# Altium PCB Tigershark 3D R2.2.PcbDoc (part 2 of 4)
Units mil, origin at the board's own origin, x right, y up, seen from the top; angles counter-clockwise.
Board outline 4100 x 4050 mil, 4 copper layers (Top Layer, Groun Plane, Power Plane, Bottom Layer), stack 61.73 mil thick; 359 components, 238 nets, 1141 pads, 830 vias.
Unrouted connection lines stored in the file: 3.
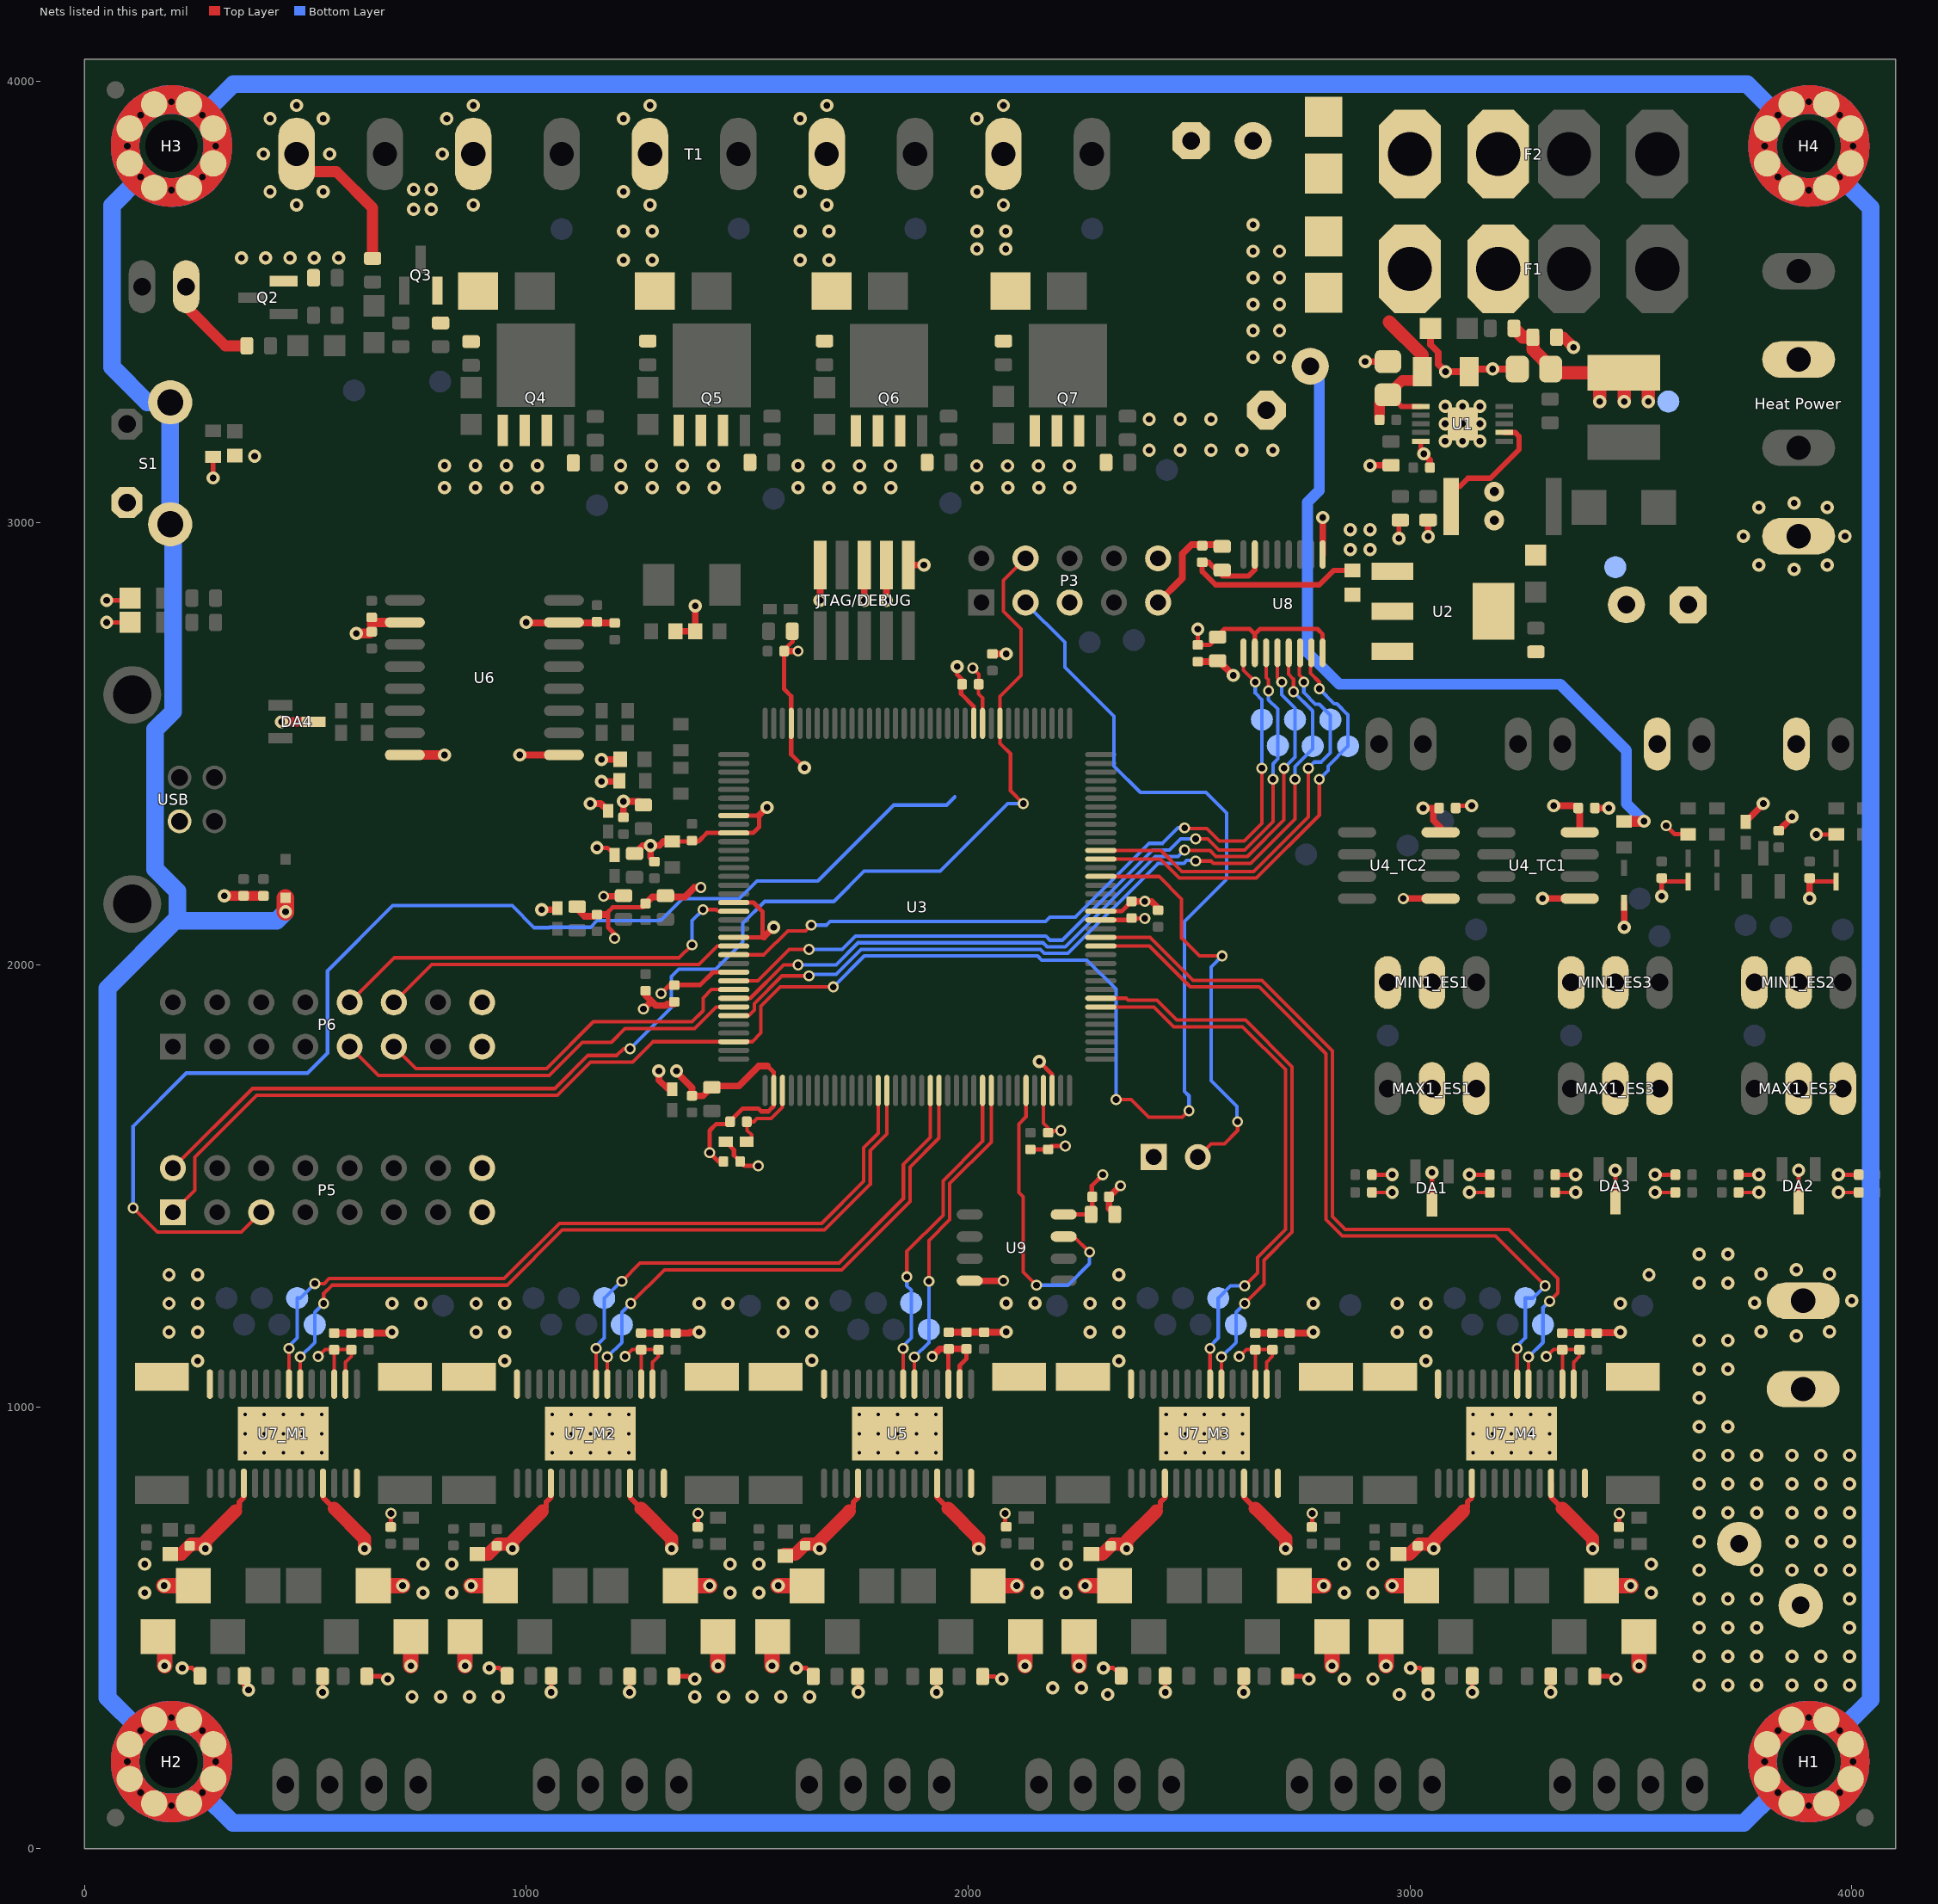
[diagram p4: the nets of this part, all layers, seen from the top]

## Footprints (in the part's own frame and the unit in brackets; to place one, negate y for a bottom-side part, rotate by r counter-clockwise, add the part's x,y. Pads: shape width x height; smd on the part's side, far side on the other; paste and mask are expansions set on the pad) (continued)
MAXM-S8+4_N [mm] "SOIC, 8-Leads, Body 4.9x3.9mm, Pitch 1.27mm, IPC Medium Density"
  oval 2.2x0.6 smd: 1(-2.4,1.905) 2(-2.4,0.635) 3(-2.4,-0.635) 4(-2.4,-1.905) 5(2.4,-1.905) 6(2.4,-0.635) 7(2.4,0.635) 8(2.4,1.905)
  silkscreen extent -2.53,-2.5 0.9,2.88, body extent -2,-2.5 2,2.5, height 1.75
"MSTBV2 - duplicate" [mil]
  oval 82.5x165 hole 55: 1(-300,0) 2(-100,0)
  silkscreen extent -425,-150 25,180, body extent -425,-150 25,180, height 472
MSTBV4 [mil]
  oval 82.5x165 hole 55: 1(-300,0) 2(-100,0) 3(100,0) 4(300,0)
  silkscreen extent -425,-150 425,180, body extent -428,-153 428,183, height 472
MSTBV10 [mil]
  oval 82.5x165 hole 55: 1(-900,0) 2(-700,0) 3(-500,0) 4(-300,0) 5(-100,0) 6(100,0) 7(300,0) 8(500,0) 9(700,0) 10(900,0)
  silkscreen extent -1025,-150 1025,180, body extent -1028,-153 1025,183, height 472
OSHW_8X150_NOTEXT [mil]
  silkscreen extent 0,0 167,150, body extent 0,2 168,148
PN61729 [mil]
  round 54 hole 38: 1(50,186) 2(-49.21,186) 3(-49.21,107) 4(50,107)
  round 130.5 hole 87: 5(-236.22,0) 6(237,0)
  body extent -237,-405 238,226, height 406
PSMN7R0-60YS [mm] "TO, 5-Pads, Body 5.15x5.86mm (max), IPC Medium Density"
  rect 1.8x0.6 smd: 1(-2.6,1.905) 2(-2.6,0.635) 3(-2.6,-0.635) 4(-2.6,-1.905)
  rect 4.8x4.5 smd: 5(1.14,0)
  silkscreen extent -2.72,2.63 -2.48,2.88, body extent -1.85,-2.5 2.25,2.5, height 1.2
R0402 [mil]
  rrect40% 22x24 smd: 1(-18.9,0) 2(19,0)
  body extent -20,-10 20,10, height 14
R0603 [mm]
  rrect40% 0.74x1 smd: 1(-0.68,0) 2(0.68,0)
  body extent -0.8,-0.4 0.8,0.4, height 0.8
Resistor2512 [mm]
  rect 1.6x3.1 smd: 1(-3.25,0) 2(3.25,0)
  silkscreen extent -2.26,-1.3 2.26,1.3, body extent -3.24,-1.4 3.24,1.4, height 0.9
S25FL216K0PMFI041 [mm] "SOIC, 8-Leads, Body 4.90x3.90mm, Pitch 1.27mm, IPC Medium Density"
  oval 1.5x0.6 smd: 1(-2.7,1.905) 2(-2.7,0.635) 3(-2.7,-0.635) 4(-2.7,-1.905) 5(2.7,-1.905) 6(2.7,-0.635) 7(2.7,0.635) 8(2.7,1.905)
  silkscreen extent -2.82,-2.45 1.55,2.88, body extent -1.95,-2.45 1.95,2.45, height 1.75
SK310A-TP [mm] "Molded Diode, 2-Leads, Body 4.31x2.69mm, IPC Medium Density"
  rect 2.3x2.15 smd: 1(-1.625,0) 2(1.625,0)
  silkscreen extent -2.3,-1.45 3.07,1.75, body extent -2.29,-1.42 2.28,1.42, height 2.95
SMA-SM [mil]
  rect 79x79 smd: A(79,0) C(-78.74,0)
  silkscreen extent -89,-49 89,50, body extent -105,-54 105,55, height 116
SOD323-R [mil]
  rect 24x24 smd: A(44,0) C(-43.31,0)
  body extent -50,-31 50,31, height 28
SOT95P230X110-3N [mm] "SOT23, 3-Leads, Body 2.90x2.30mm, Pitch 0.95mm, IPC Medium Density"
  rect 1.4x0.6 smd: 1(-0.95,0.95) 2(-0.95,-0.95) 3(0.95,0)
  silkscreen extent -1.07,-1.5 0.7,1.93, body extent -0.7,-1.5 0.7,1.5, height 1.1
SOT230P700X190-4N [mm] "SOT223, 4-Leads, Body 6.50x7.00mm (avg), Pitch 2.30mm, IPC Medium Density"
  rect 2.4x1 smd: 1(-2.9,2.3) 2(-2.9,0) 3(-2.9,-2.3)
  rect 2.4x3.25 smd: 4(2.9,0)
  silkscreen extent -3.02,-3.35 1.4,3.47, body extent -1.85,-3.35 1.85,3.35, height 1.9
SZMM3Z4V7T1G [mm] "Molded Diode, 2-Leads, Body 1.70x1.25mm, IPC Medium Density"
  rect 0.9x0.35 smd: 1(-1,0) 2(1,0)
  silkscreen extent -0.95,-0.7 1.4,0.7, body extent -0.9,-0.67 0.9,0.67, height 1
TP-2#1 [mil]
  round 50 smd far side: 1(0,0)
TP-2#2 [mil]
  round 50 smd: 1(0,0)
TSOP65P640X120-16N [mm] "TSOP, 16-Leads, Body 5.00x4.40mm, Pitch 0.65mm, IPC Medium Density"
  oval 1.65x0.35 smd: 1(-2.825,2.275) 2(-2.825,1.625) 3(-2.825,0.975) 4(-2.825,0.325) 5(-2.825,-0.325) 6(-2.825,-0.975) 7(-2.825,-1.625) 8(-2.825,-2.275) 9(2.825,-2.275) 10(2.825,-1.625) 11(2.825,-0.975) 12(2.825,-0.325) 13(2.825,0.325) 14(2.825,0.975) 15(2.825,1.625) 16(2.825,2.275)
  silkscreen extent -2.95,-2.55 1.6,3.12, body extent -2.25,-2.55 2.25,2.55, height 1.2
VSSOP10 [mm] "TSSOP, 10-Leads, Body 3.15x3.00mm, Pitch 0.50mm, Thermal Pad 2.05.2x1.50.2mm, IPC High Density"
  rect 1.02x0.3 smd mask+0.102: 1(-2.4,1) 2(-2.4,0.5) 3(-2.4,0) 4(-2.4,-0.5) 5(-2.4,-1) 6(2.4,-1) 7(2.4,-0.5) 8(2.4,0) 9(2.4,0.5) 10(2.4,1)
  rect 1.73x1.9 smd: 11(0,0)
  silkscreen extent -2.02,-1.7 0.65,1.82, body extent -1.55,-1.7 1.55,1.7, height 1.09
Wave_hole_3x7-singleSided#1 [mil]
  round 0 hole 118.11 unplated paste+0 mask-112: 0(0,1.85)
  round 0 hole 15 paste-20 mask-20: 1(-100,0) 1(-70,-70) 1(-70,70) 1(0,-100) 1(0,100) 1(70,-70) 1(70,70) 1(100,0)
  round 60 smd paste-5 mask+0: 1(-94.49,-39.37) 1(-94.49,39.37) 1(-39.37,-94.49) 1(-39.37,94.49) 1(39.37,-94.49) 1(39.37,94.49) 1(94.49,-39.37) 1(94.49,39.37)
  Top Layer circle w64.96: c0,0 r105
  Bottom Layer lines w64.96: -78.26,-70 cw(c0,0) 74.25,74.25 cw(c0,0) 105,0 cw(c0,0) -78.26,-70
  body extent -105,-105 105,105
Wave_hole_3x7-singleSided#2 [mil]
  round 0 hole 118.11 unplated paste+0 mask-112: 0(0,0)
  round 0 hole 15 paste-20 mask-20: 1(-100,0) 1(-70,-70) 1(-70,70) 1(0,-100) 1(0,100) 1(70,-70) 1(70,70) 1(100,0)
  round 60 smd paste-5 mask+0: 1(-94.49,-39.37) 1(-94.49,39.37) 1(-39.37,-94.49) 1(-39.37,94.49) 1(39.37,-94.49) 1(39.37,94.49) 1(94.49,-39.37) 1(94.49,39.37)
  Top Layer circle w64.96: c0,0 r105
  Bottom Layer lines w64.96: -74.25,74.25 cw(c0,0) 105,0 cw(c0,0) 74.25,-74.25 cw(c0,0) -74.25,74.25
  body extent -105,-105 105,105
XAL50xx-153 [mm] "Precision Wire Wound Inductor, 2-Leads, Body 5.28x5.48mm, IPC High Density"
  rect 2.05x4.2 smd: 1(-2,0) 2(2,0)
  silkscreen extent -2.75,-2.85 2.75,2.85, body extent -2.74,-2.84 2.74,2.84, height 4.25

## Part data
C1_ES1 C1_ES2 C1_ES3 C2_ES1 C2_ES2 C2_ES3 C24 C50 C71_M1 C71_M2 C71_M3 C71_M4: library part GRM155R60J474KE19D, "0.47uF 6.3v C0402 - GRM155R60J474KE19D"
C3_M1 C3_M2 C3_M3 C3_M4 C5_M1 C5_M2 C5_M3 C5_M4 C6_M1 C6_M2 C6_M3 C6_M4 C8_M1 C8_M2 C8_M3 C8_M4 C52 C62 C67 C72: library part CC0603ZRY5V6BB105, "CAP CER 0603 1uF 10V Y5V"
C4 C35 C43 C44 C66_M1 C66_M2 C66_M3 C66_M4 C73: library part "Cap Semi", "Capacitor (Semiconductor SIM Model)"
C7: library part UPW1H471MHD1TO, "CAP ALU 470uF 50V 20%"
C9: library part C1206C475K5PACTU, "CAP CER 1206 4.7uF 50V 10% X5R"
C10: library part GRM21BR71H105KA12L, "CAP CER 0805 1uF 50V 10% X7R"
C11 C40: library part C0603C104K5RACTU, "CAP CER 0603 100nF 50V 10% X7R"
C12_M1 C12_M2 C12_M3 C12_M4 C14_M1 C14_M2 C14_M3 C14_M4 C19 C23 C27 C31_TC1 C31_TC2 C33 C37 C38 C39 C41 C42 C45 C46 C47 C48 C51 C53 C54 C56 C57 C58 C59 C61 C69 C70 C75_M1 C75_M2 C75_M3 C75_M4: library part "100nF C0402 - GRM155R71C104KA88D", "Capacitor (Semiconductor SIM Model)"
C13 C17 C25 C28 C29 C32 C36 C55 C60: library part C1608JB0J106K080AB, "CAP CER 10UF 6.3V 10% JB 0603"
C15 C16 C18: library part UVZ1H101MPD1TD, "CAP ALU 100uF 50V 20% 105C"
C20 C26 C30_TR1 C30_TR2 C34 C64 C65: library part GRM155R71C104KA88D, "CAP CER 0.1UF (100nF) 16V 10% X7R 0402"
C21: library part C0805C106K8PACTU, "CAP CER 0805 10uF 10V 10% X5R"
C22: library part GRM155R60J105KE19D, "CAP CER 0402 1uF 6.3V 10% X5R"
C49 C68_M1 C68_M2 C68_M3 C68_M4: library part GRM155R71H103JA88D, "CAP CER 10000PF 50V X7R 0402"
C63: "Capacitor (Semiconductor SIM Model)"
D1: library part "D Zener", "Zener Diode"
D2: library part SK310A, "DIODE Schottky 3A SMA"
D3_TR1 D3_TR2 D5_TR1 D5_TR2: "High Conductance Fast Diode"
D4 D6 D12 D15 D17 D19: library part "D Schottky", "Schottky Diode"
D7 D9: "LED 0805 Red"
D8: "DIODE TVS"
D10 D11 D13 D14 D16 D18 D24 D29: "LED 0805 Yellow"
D20_M1 D20_M2 D20_M3 D20_M4 D21_M1 D21_M2 D21_M3 D21_M4 D22_M1 D22_M2 D22_M3 D22_M4 D23_M1 D23_M2 D23_M3 D23_M4 D25 D26 D27 D28: "DIODE TVS 30V SMA"
DA1 DA2 DA3 DA4 DA5: "PESDxL2BT TVS Diode Array 2x"
F1 F2: library part "Fuse 1", "Fuse"
"Heat Power": library part con-phoenix-508_4
JTAG/DEBUG: library part "ARM Cortex JTAG-DEBUG Header"
L1: "IND 15uH 3.9A 20%"
M1_M1 M1_M2 M1_M3 M1_M4 M2 M3: library part "Molex 0705430003 Alt", "Molex 4 Pin Clip Connector"
MAX1_ES1 MAX1_ES2 MAX1_ES3 MIN1_ES1 MIN1_ES2 MIN1_ES3: library part "Molex Endstop"
"Motor Power": library part con-phoenix-508_2
P1: library part "Header 2", "Header, 2-Pin"
P3: "Header, 5-Pin, Dual row"
P5 P6: "16 Pos 2.54mm Pin Connector Shrouded"
Q2 Q3 Q4 Q5 Q6 Q7: "N-Channel MOSFET"
R1 R14_TR1 R14_TR2 R19_TR1 R19_TR2 R21: "Resistor"
R2_ES1 R2_ES2 R2_ES3 R3_ES1 R3_ES2 R3_ES3: library part ERJ-2GEJ272X, "RES SMD 2.7K OHM 5% 1/10W 0402"
R4 R5 R15 R16 R18 R20 R22 R23 R31_M1 R31_M2 R31_M3 R31_M4 R32_M1 R32_M2 R32_M3 R32_M4 R33_M1 R33_M2 R33_M3 R33_M4 R37 R38 R39: library part Res3, "Resistor"
R6 R46 R55 R59 R63 R67 R71: library part RC0603FR-07100KL, "RES 100K OHM 1/10W 1% 0603 SMD"
R7 R10 R12: library part ERJ-3EKF1002V, "RES 0603 10K 100mW 1%"
R8 R11 R25 R26: library part ERJ-3EKF1001V, "RES 0603 1K 100mW 1%"
R9: library part RL2512FK-070R06L, "RES 0.06 OHM 1W 1% 2512 SMD"
R13 R47 R56 R60 R64 R68: library part RC0603JR-071K8L, "RES 0603 1.8K 100mW 5%"
R17: library part CRCW0402200KFKED, "RES 0402 22r 63mW 1%"
R24 R30_M1 R30_M2 R30_M3 R30_M4 R36: library part ERJ2GEJ105X, "RES 0402 1M 100mW 5%"
R45 R52 R58 R62 R66 R70: library part CRCW060310R0FKEA, "RES 0603 10r 100mW 1%"
S1: library part 1571610-2_1, "SWTCH Momentary Washable"
T1: library part "0395311010 - Molex 10 Position Connector", "MSBTV10 10 port connector same as RAMBo"
TP1 TP2 TP3 TP4 TP5 TP6 TP7 TP8 TP9_ES1 TP9_ES2 TP9_ES3 TP10_ES1 TP10_ES2 TP10_ES3 TP11 TP12 TP13 TP14 TP15 TP16 TP17 TP18 TP19 TP20 TP21 TP32_M1 TP32_M2 TP32_M3 TP32_M4 TP33_M1 TP33_M2 TP33_M3 TP33_M4 TP35_M1 TP35_M2 TP35_M3 TP35_M4 TP36_M1 TP36_M2 TP36_M3 TP36_M4 TP37_M1 TP37_M2 TP37_M3 TP37_M4 TP38 TP39_M1 TP39_M2 TP39_M3 TP39_M4 TP40_M1 TP40_M2 TP40_M3 TP40_M4 TP41 TP42 TP43 TP44 TP45 TP46 TP47 TP48 TP49 TP50 TP51 TP52_TR1 TP52_TR2: library part Socket, "Socket"
U1: library part LM25011, "REG BUCK"
U4_TC1 U4_TC2: "Cold Junction Compensated Thermocouple to Digital Converter, 14 Bits Temperature Resolution, -40 to 125 degC, 8-Pin SOIC (S8+4), Pb-Free"
U5 U7_M1 U7_M2 U7_M3 U7_M4: "DRV8825 Ti Stepper Driver"
U6: "USB Opto Isolator"
U8: library part TXB0106, "TXB0106 - Bidriectional Opendrain/pushpull level shift"
X2: library part XTAL, "Crystal Oscillator"

## Via types
v1: diameter 30, hole 15, Top Layer to Bottom Layer, tented both sides, 528 vias
v2: diameter 25, hole 15, Top Layer to Bottom Layer, tented both sides, 154 vias
v3: diameter 19.68, hole 7.87, Top Layer to Bottom Layer, 75 vias
v4: diameter 25, hole 15, Top Layer to Bottom Layer, 61 vias
v5: diameter 30, hole 15, Top Layer to Bottom Layer, 9 vias
v6: diameter 45, hole 20, Top Layer to Bottom Layer, tented both sides, 2 vias
v7: diameter 25, hole 15, Top Layer to Bottom Layer, tented bottom, 1 vias

## Nets (pads, with @x,y where several pads share a name; then routed paths per layer and width w, separated by ;. In a path a pad name is that pad's centre, name@x,y a point inside that pad or via, vN(x,y) a via of type N, cw(c..) or ccw(c..) an arc to the next point about the centre after c; other vN are vias at no path point)
3.3VCC: C12_M1.2 C12_M2.2 C12_M3.2 C12_M4.2 C14_M1.2 C14_M2.2 C14_M3.2 C14_M4.2 C18.1 C25.2 C26.2 C29.2 C31_TC1.2 C31_TC2.2 C34.2 C45.2 C46.2 C47.2 C48.2 C64.2 C69.2 C70.2 FB1.2 FB5.1 FB6.1 FB7.1 FB8.1 FB9.1 JTAG/DEBUG.1 MAX1_ES1.3 MAX1_ES2.3 MAX1_ES3.3 MIN1_ES1.3 MIN1_ES2.3 MIN1_ES3.3 P1.1 P3.10 P5.16 P6.16 R2_ES1.2 R2_ES2.2 R2_ES3.2 R3_ES1.2 R3_ES2.2 R3_ES3.2 R6.2 R11.2 R19_TR1.2 R19_TR2.2 R21.2 TP3.1 U2.3 U3.11 U3.62 U3.105 U3.125 U4_TC1.4 U4_TC2.4 U5.16 U5.17 U7_M1.16 U7_M1.17 U7_M2.16 U7_M2.17 U7_M3.16 U7_M3.17 U7_M4.16 U7_M4.17 U8.2 U8.8 U9.8 | length 3420.9
  Top Layer w8: v2(528.74,1113.74) 544.74,1129.74 C12_M1.2@563.74,1129.74 ; U7_M1.17@565.16,1052.2 565.16,1128.32 C12_M1.2@563.74,1129.74 ; U7_M1.16@588.74,1054.21 590.75,1052.2 590.75,1100.75 603.74,1113.74 C14_M1.2@603.74,1128.74 ; C14_M1.2@603.74,1129.74 C12_M1.2@563.74,1129.74 ; R6.2@1211.77,2155 R6.2@1215,2151.77 ; v2(1223.74,1113.74) 1239.74,1129.74 C12_M2.2@1258.74,1129.74 ; U7_M2.17@1260.16,1052.2 1260.16,1128.32 C12_M2.2@1258.74,1129.74 ; U7_M2.16@1283.74,1054.21 1285.75,1052.2 1285.75,1100.75 1298.74,1113.74 C14_M2.2@1298.74,1128.74 ; C14_M2.2@1298.74,1129.74 C12_M2.2@1258.74,1129.74 ; JTAG/DEBUG.1@1865,2904.92 JTAG/DEBUG.1@1865.08,2905 ; v2(2010.47,2671.46) 2024.47,2657.46 2024.47,2627.54 2023.56,2626.63 2023.56,2613.37 2032.64,2604.29 U3.11@2032.64,2546.46 ; U3.105@2170.43,1715.75 2170.43,1641.77 2181.1,1631.1 C45.2@2181.1,1620.1 2186.2,1615 2196.2,1625 v2(2210,1625) ; v4(2613.74,1113.74) 2629.74,1129.74 C12_M3.2@2648.74,1129.74 ; U7_M3.17@2650.16,1052.2 2650.16,1128.32 C12_M3.2@2648.74,1129.74 ; U7_M3.16@2673.74,1054.21 2675.75,1052.2 2675.75,1100.75 2688.74,1113.74 C14_M3.2@2688.74,1128.74 ; C14_M3.2@2688.74,1129.74 C12_M3.2@2648.74,1129.74 ; R3_ES1.2@2914,1485 v1(2960,1485) ; v1(3135,1485) R2_ES1.2@3181,1485 ; v4(3308.74,1113.74) 3324.74,1129.74 C12_M4.2@3343.74,1129.74 ; R3_ES3.2@3329,1485 v1(3375,1485) ; U7_M4.17@3345.16,1052.2 3345.16,1128.32 C12_M4.2@3343.74,1129.74 ; U7_M4.16@3368.74,1054.21 3370.75,1052.2 3370.75,1100.75 3383.74,1113.74 C14_M4.2@3383.74,1128.74 ; C14_M4.2@3383.74,1129.74 C12_M4.2@3343.74,1129.74 ; v1(3555,1485) R2_ES3.2@3601,1485 ; R3_ES2.2@3744,1485 v1(3790,1485) ; v1(3970,1485) R2_ES2.2@4016,1485
  Top Layer w10: v1(291,3102) R21.2@291,3149.47 ; v1(1160,2265) 1183.62,2265 FB7.1@1200,2248.62 ; v2(1305,1935) 1324.5,1954.5 1393.54,1954.5 1422.51,1983.46 U3.62@1469.65,1983.46 ; FB9.1@1451.38,1600 1470,1581.38 1470,1569 C64.2@1484,1555 1494,1545 v4(1525,1545) ; U5.17@1955.42,1051.94 C69.2@1955.42,1129.9 ; U5.16@1981.01,1051.94 1981.01,1093.49 1996.26,1108.74 C70.2@1996.26,1130.74 ; U9.8@2216.3,1435 C29.2@2278.23,1435 2281,1437.77 C34.2@2281,1475 2280,1476 2280,1500 v2(2305,1525) ; U3.125@2300.35,2101.57 C46.2@2365.57,2101.57 ; C46.2@2371,2105 v2(2400,2105) ; v1(2520,2760) C26.2@2520,2724 2547.23,2724 C25.2@2565,2741.77 ; C25.2@2560,2740 2580,2760 2637.44,2760 2649.02,2748.42 ; U8.2@2649.02,2706.22 2649.02,2748.42 ; U8.8@2802.57,2706.22 2802.57,2747.87 2790.44,2760 2660.61,2760 2649.02,2748.42 ; 3367.95,2360 C31_TC1.2@3384.49,2343.46 ; v2(3580,2315) 3599.53,2295.47 R19_TR2.2@3630,2295.47 ; v1(3920,2295) 3964.53,2295 R19_TR1.2@3965,2295.47
  Top Layer w15: v1(1035,2125) 1059.72,2125 FB5.1@1060,2124.72 ; v1(1145,2365) 1168.62,2365 FB8.1@1185,2348.62 ; v2(1175,2155) 1201.77,2155 1206.77,2150 R6.2@1211.77,2155 ; v1(1300,1760) 1300,1739.72 FB6.1@1320,1719.72 ; JTAG/DEBUG.1@1865.08,2905 v1(1900,2905) ; v4(1918.77,1113.71) 1935.8,1130.74 C69.2@1956.26,1130.74 C70.2@1996.26,1130.74 ; C46.2@2370,2106 C46.2@2371,2105 ; v1@3025,2360 3025,2355 3052.95,2355 ; C31_TC2.2@3056,2355 3052.95,2355 ; U4_TC2.4@3069.49,2300 3069.49,2311.02 3052.95,2327.56 3052.95,2355 ; v1(3325.51,2360) 3367.95,2360 ; U4_TC1.4@3384.49,2300 C31_TC1.2@3384.49,2343.46 ; FB1.2@3760,2323.62 3800,2363.62 v1(3800,2365)
  other v1: 3030,2355
+5VCC: C4.2 C11.1 C17.2 C20.2 C21.1 L1.2 R7.2 R8.2 R10.1 TP1.1 U2.1 U8.15 | length 1132.3
  Top Layer w12: C20.2@2530,2911 2530,2890 2560,2860 2795,2860 2827.56,2892.56 C4.2@2870,2892.56 ; C20.2@2530,2916 2531.51,2915.49 2544.88,2911 2575.88,2880 2635,2880 2649.02,2894.02 U8.15@2649.02,2928.66
  Top Layer w15: v1@2909.31,3130.43 2957.09,3130.43 R7.2@2957.32,3130.65 ; v1(3041.31,2969.43) R10.1@3041.31,3006.66
  Top Layer w30: R8.2@3235.54,3440.43 3255.54,3420.43 C11.1@3278.54,3420.43 3278.54,3392.69 3318.72,3352.52 C21.1@3318.72,3348.43 ; C21.1@3326.98,3340.17 L1.2@3484.31,3340.17 ; v1(3430,3275) L1.2@3430,3335.17 ; v1(3485,3275) L1.2@3485,3339.48 ; v1(3540,3275) L1.2@3540,3340
  other v1: 2865,2940 2910,2940 2865,2985 2910,2985 2910,3130
+12VCC1: "Motor Power.1" C7.1 C35.1 C66_M1.1 C66_M2.1 C66_M3.1 C66_M4.1 R30_M1.2 R30_M2.2 R30_M3.2 R30_M4.2 R36.2 U5.4 U5.11 U7_M1.4 U7_M1.11 U7_M2.4 U7_M2.11 U7_M3.4 U7_M3.11 U7_M4.4 U7_M4.11 | length 2331.6
  Top Layer w12: 341.26,763.74 350.26,772.74 350.26,784.25 360.43,794.42 U7_M1.4@360.43,826.8 U7_M1.4@360.43,827.8 ; U7_M1.11@539.57,827.8 539.57,795.43 565,770 ; 1036.26,763.74 1045.26,772.74 1045.26,784.25 1055.43,794.42 U7_M2.4@1055.43,826.8 U7_M2.4@1055.43,827.8 ; U7_M2.11@1234.57,827.8 1234.57,795.43 1260,770 ; 1731.29,763.71 1740.29,772.71 1740.29,784.22 1750.46,794.39 U5.4@1750.46,826.76 ; U5.11@1929.6,827.76 1929.6,795.4 1955.03,769.97 ; 2426.26,763.74 2435.26,772.74 2435.26,784.25 2445.43,794.42 U7_M3.4@2445.43,826.8 U7_M3.4@2445.43,827.8 ; U7_M3.11@2624.57,827.8 2624.57,795.43 2650,770 ; 3121.26,763.74 3130.26,772.74 3130.26,784.25 3140.43,794.42 U7_M4.4@3140.43,826.8 U7_M4.4@3140.43,827.8 ; U7_M4.11@3319.57,827.8 3319.57,795.43 3345,770
  Top Layer w30: C66_M1.1@193.74,666.18 218.7,666.18 241.26,688.74 263.74,688.74 v1(273.74,678.74) 273.74,696.22 341.26,763.74 ; 565,770 633.74,701.26 v1(633.74,678.74) ; C66_M2.1@888.74,666.18 913.7,666.18 936.26,688.74 958.74,688.74 v1(968.74,678.74) 968.74,696.22 1036.26,763.74 ; 1260,770 1328.74,701.26 v1(1328.74,678.74) ; C35.1@1583.77,666.15 1608.73,666.15 1631.29,688.71 1653.77,688.71 v1(1663.77,678.71) 1663.77,696.19 1731.29,763.71 ; 1955.03,769.97 2023.77,701.23 v1(2023.77,678.71) ; C66_M3.1@2278.74,666.18 2303.7,666.18 2326.26,688.74 2348.74,688.74 v1(2358.74,678.74) 2358.74,696.22 2426.26,763.74 ; 2650,770 2718.74,701.26 v1(2718.74,678.74) ; C66_M4.1@2973.74,666.18 2998.7,666.18 3021.26,688.74 3043.74,688.74 v1(3053.74,678.74) 3053.74,696.22 3121.26,763.74 ; 3345,770 3413.74,701.26 v1(3413.74,678.74)
  other v1: 741.26,343.74 806.26,343.74 871.26,343.74 936.26,343.74 1381.26,343.74 1446.26,343.74 1511.26,343.74 1576.26,343.74 1641.26,343.74 2316.26,348.74 2976.26,348.74 3041.26,348.74 2191.26,363.74 2256.26,363.74 3655,370 3720,370 3785,370 2851.26,383.74 2916.26,383.74 3655,435 3720,435 3785,435 3655,500 3720,500 3785,500 3655,565 3720,565 3785,565 136.26,578.74 766.26,578.74 831.26,578.74 1461.26,578.74 1526.26,578.74 2156.29,578.71 2221.29,578.71 2851.26,578.74 2916.26,578.74 3546.26,578.74 3655,630 3785,630 136.26,643.74 766.26,643.74 831.26,643.74 1461.26,643.74 1526.26,643.74 2156.29,643.71 2221.29,643.71 2851.26,643.74 2916.26,643.74 3546.26,643.74 3655,695 3655,760 3720,760 3785,760 3655,825 3720,825 3785,825 3655,890 3720,890 3785,890 3655,955 3720,955 3655,1020 3655,1085 3720,1085 3655,1150 3720,1150 3875,1160 3795,1170 3950,1170 3780,1235 4000,1240 3655,1280 3720,1280 3795,1300 3950,1300 3875,1310 3655,1345 3720,1345
+12VCC2: C9.1 C10.1 C16.1 D6.2 D12.2 D15.2 D17.2 F1.2 FAN-1.1 R1.2 R13.2 R17.2 R47.2 R56.2 R60.2 R64.2 T1.1 T1.3 T1.5 T1.7 U1.1 | length 2587.6
  Top Layer w12: C10.1@2971.68,3272.95 2980.83,3263.8 U1.1@3024.83,3263.8
  Top Layer w24: R17.2@2931.31,3233.43 C10.1@2931.31,3271.02 ; C10.1@2950.31,3290.02 2982.72,3322.43 C9.1@3008.15,3322.43
  Top Layer w25: FAN-1.1@230,3535 230,3490 319,3401 R13.2@367.23,3401 ; T1.1@480,3810 495,3795 570,3795 652,3713 R47.2@652,3598.77 ; R1.2@3485,2324.53 3529.53,2324.53 v1(3530,2325)
  Top Layer w30: 2953.21,3454.87 3028.17,3379.91 C9.1@3028.17,3342.43
  Bottom Layer w25: C16.1@2774.5,3354.5 2795,3333.99 2795,3073.87 2768.07,3046.93 2768.07,2706.93 2840,2635 3340,2635 3490,2485 3490,2365 v1(3530,2325) ; F1.2@3200,3545 F1.2@3200,3575
  other v1: 1220,3595 1285,3595 1620,3595 1685,3595 1220,3660 1285,3660 1620,3660 1685,3660 480,3720 880,3720 1280,3720 1680,3720 420,3750 540,3750 1220,3750 1620,3750 405,3835 555,3835 810,3835 420,3915 540,3915 820,3915 1220,3915 1620,3915 480,3945 880,3945 1280,3945 1680,3945
+12VCC3: C15.1 D4.2 D19.2 F2.2 R68.2 T1.9
  other v1: 2020,3620 2085,3620 2020,3660 2085,3660 2080,3720 2020,3750 2020,3915 2080,3945
AVREF: C65.2 FB9.2 U3.75 | length 169
  Top Layer w8: C65.2@1499,1645 1515,1645 1522.31,1652.31 1554.56,1652.31 1579.88,1677.64 U3.75@1579.88,1715.75 ; C65.2@1500,1636 1500,1625 1510,1615 FB9.2@1510,1603.62
BED_PWM: TP38.1 U3.132 U8.7 | length 995.2
  Top Layer w8: U3.132@2300.35,2239.37 2435.16,2239.37 2478.03,2196.5 2652.71,2196.5 2795,2338.79 v2@2795,2410 ; U8.7@2776.98,2706.22 2775,2704.24 2775,2660 2795,2640 v2(2795,2625)
  Bottom Layer w8: v2(2795,2420) 2815,2440 2815,2450 TP38.1@2860,2495 2860,2565.91 2834.91,2591 2829,2591 v2(2795,2625)
DIR1: TP39_M1.1 U3.87 U7_M1.20 | length 1793.3
  Top Layer w8: U7_M1.20@488.39,1052.2 v2(488.39,1112.64) ; v2(541.26,1233.74) 541.26,1256.26 560,1275 956.07,1275 1081.07,1400 1674.85,1400 1778.5,1503.65 1778.5,1579.57 1816.1,1617.17 U3.87@1816.1,1715.75
  Bottom Layer w8: v2(488.39,1112.64) 521.23,1145.48 TP39_M1.1@521.23,1185.77 521.23,1213.71 v2(541.26,1233.74)
DIR2: TP39_M2.1 U3.93 U7_M2.20 | length 1209.7
  Top Layer w8: U7_M2.20@1183.39,1052.2 v2(1183.39,1112.64) ; v2(1236.26,1233.74) 1312.52,1310 1713.93,1310 1868.5,1464.57 1868.5,1542.29 1934.21,1608 U3.93@1934.21,1715.75
  Bottom Layer w8: v2(1183.39,1112.64) 1216.23,1145.48 TP39_M2.1@1216.23,1185.77 1216.23,1213.71 v2(1236.26,1233.74)
DIR3: TP39_M3.1 U3.116 U7_M3.20 | length 1280.8
  Top Layer w8: U3.116@2300.35,1924.41 2357.8,1924.41 2362.48,1919.72 2427.15,1919.72 2471.87,1875 2627.72,1875 2733.5,1769.22 2733.5,1395.01 2670,1331.51 2670,1277.48 v4(2626.26,1233.74) ; U7_M3.20@2573.39,1052.2 v4(2573.39,1112.64)
  Bottom Layer w8: v4(2573.39,1112.64) 2606.23,1145.48 TP39_M3.1@2606.23,1185.77 2606.23,1213.71 v4(2626.26,1233.74)
DIR4: TP39_M4.1 U3.123 U7_M4.20 | length 1839.6
  Top Layer w8: U3.123@2300.35,2062.2 2411.95,2062.2 2509.15,1965 2665,1965 2825,1805 2825,1430 2853.5,1401.5 3223.5,1401.5 3335,1290 3335,1257.54 v4(3316.23,1238.77) ; U7_M4.20@3268.39,1052.2 v4(3268.39,1112.64)
  Bottom Layer w8: v4(3268.39,1112.64) 3301.23,1145.48 TP39_M4.1@3301.23,1185.77 3301.23,1223.77 v4(3316.23,1238.77)
DIR_EXP1: P6.11 U3.64 | length 881.4
  Top Layer w8: P6.11@700,1815 750,1765 1045.7,1765 1151.68,1870.98 1374.77,1870.98 1400,1896.21 1400,1925 1419.09,1944.09 U3.64@1469.65,1944.09
DIR_EXP2: P6.12 U3.59 | length 822.5
  Top Layer w8: P6.12@700,1915 786,2001 1391,2001 1432.52,2042.52 U3.59@1469.65,2042.52
DIR_Z: TP20.1 U3.99 U5.20 | length 735.6
  Top Layer w8: U5.20@1878.42,1052.17 v4(1878.42,1112.61) ; v4(1911.26,1283.74) 1911.26,1376.26 1958.5,1423.5 1958.5,1505.01 2052.32,1598.83 U3.99@2052.32,1715.75
  Bottom Layer w8: v4(1878.42,1112.61) 1911.26,1145.45 TP20.1@1911.26,1174.74 v4(1911.26,1283.74)
EN1: TP32_M1.1 U3.86 U7_M1.21 | length 1812.4
  Top Layer w8: U7_M1.21@462.8,1052.2 v2(462.8,1132.05) ; v2(521.26,1278.74) 542.53,1278.74 553.79,1290 949.85,1290 1074.85,1415 1668.64,1415 1763.5,1509.86 1763.5,1585.78 1796.42,1618.7 U3.86@1796.42,1715.75
  Bottom Layer w8: v2(462.8,1132.05) 462.8,1137.34 481.23,1155.77 TP32_M1.1@481.23,1245.77 488.29,1245.77 v2(521.26,1278.74)
EN2: TP32_M2.1 U3.92 U7_M2.21 | length 1239.9
  Top Layer w8: U7_M2.21@1157.8,1052.2 v2(1157.8,1132.05) ; v2(1216.26,1283.74) 1257.52,1325 1707.72,1325 1853.5,1470.78 1853.5,1548.5 1914.53,1609.53 U3.92@1914.53,1715.75
  Bottom Layer w8: v2(1157.8,1132.05) 1157.8,1137.34 1176.23,1155.77 TP32_M2.1@1176.23,1245.77 v2@1214.2,1283.74
EN3: TP32_M3.1 U3.115 U7_M3.21 | length 1277.1
  Top Layer w8: U3.115@2300.35,1904.72 2420.94,1904.72 2465.66,1860 2621.51,1860 2718.5,1763.01 2718.5,1401.22 2655,1337.72 2655,1302.48 v4(2626.26,1273.74) ; U7_M3.21@2547.8,1052.2 v4(2547.8,1132.05)
  Bottom Layer w8: v4(2547.8,1132.05) 2547.8,1137.34 2566.23,1155.77 TP32_M3.1@2566.23,1245.77 2594.2,1273.74 v4(2626.26,1273.74)
EN4: TP32_M4.1 U3.122 U7_M4.21 | length 1801.8
  Top Layer w8: U3.122@2300.35,2042.52 2410.42,2042.52 2502.94,1950 2658.79,1950 2810,1798.79 2810,1423.79 2847.29,1386.5 3193.5,1386.5 v4(3306.23,1273.77) ; U7_M4.21@3242.8,1052.2 v4(3242.8,1132.05)
  Bottom Layer w8: v4(3242.8,1132.05) 3242.8,1137.34 3261.23,1155.77 TP32_M4.1@3261.23,1245.77 3278.23,1245.77 v4(3306.23,1273.77)
EN_EXP1: P6.9 U3.66 | length 960.7
  Top Layer w8: P6.9@600,1815 665,1750 1051.91,1750 1126.91,1825 1192.57,1825 1223.56,1855.98 1380.98,1855.98 1429.72,1904.72 U3.66@1469.65,1904.72
EN_EXP2: P6.10 U3.55 | length 990.4
  Top Layer w8: P6.10@600,1915 701,2016 1346,2016 v2(1375,2045) ; v2(1400,2125) 1430,2125 1433.74,2121.26 U3.55@1469.65,2121.26
  Bottom Layer w8: v2(1375,2045) 1375,2100 v2(1400,2125)
EN_Z: TP16.1 U3.98 U5.21 | length 746.3
  Top Layer w8: U5.21@1852.83,1052.17 v4(1852.83,1132.02) ; v4(1861.26,1293.74) 1861.26,1351.26 1943.5,1433.5 1943.5,1511.22 2032.64,1600.36 U3.98@2032.64,1715.75
  Bottom Layer w8: v4(1852.83,1132.02) 1852.83,1137.31 1871.26,1155.74 1871.26,1263.74 1861.26,1273.74 v4(1861.26,1293.74)
ERASE: P1.2 U3.130 | length 946
  Top Layer w8: U3.130@2300.35,2200 2432.11,2200 2483,2149.11 2483,2060.79 2523.79,2020 v2(2575,2020) ; P1.2@2520,1565 2550,1595 2580,1595 2610,1625 v2(2610,1645)
  Bottom Layer w8: v2(2575,2020) 2550,1995 2550,1738.23 2608.5,1679.73 2608.5,1646.5 v2(2610,1645)
EXP_CS: P3.5
EXP_CS2: P5.5 | length 2835.6
  Top Layer w8: v2(110,1450) 165,1395 355,1395 P5.5@400,1440
  Bottom Layer w8: v2(110,1450) 110,1635 230,1755 505,1755 550,1800 550,1986.36 697.64,2134 968.02,2134 1018.02,2084 1051.98,2084 1052.98,2085 1145,2085 1160,2100 1300,2100 1301.5,2101.5 1304.99,2101.5 1353.49,2150 1482.16,2150 1522.16,2190 1659.85,2190 1831.35,2361.5 1951.5,2361.5 1970,2380
FET_PWM1: TP43.1 U3.60 U8.1 | length 1736.7
  Top Layer w8: U3.60@1469.65,2022.83 1537.83,2022.83 1592.1,2077.1 1632.1,2077.1 v2(1645,2090) ; v2(2490,2310) 2491.5,2308.5 2540.14,2308.5 2568.64,2280 2625,2280 2665,2320 v2@2665,2435 ; U8.1@2623.43,2706.22 2623.43,2666.57 v2(2650,2640)
  Bottom Layer w8: v2(1645,2090) 1680,2090 1687.89,2097.89 2175.02,2097.89 2185.02,2107.89 2242.89,2107.89 2410,2275 2440,2275 2475,2310 v2(2490,2310) ; v2(2650,2640) 2650,2615 2665,2600 TP43.1@2665,2555 v2(2665,2445)
FET_PWM2: TP44.1 U3.63 U8.3 | length 1785.7
  Top Layer w8: U3.63@1469.65,1963.78 1524.03,1963.78 1595.25,2035 v2(1640,2035) ; v2(2515,2285) 2542.43,2285 2567.43,2260 2626.21,2260 2690,2323.79 v2@2690,2410 ; U8.3@2674.61,2706.22 2675,2705.83 2675,2650 2680,2645 v2(2680,2620)
  Bottom Layer w8: v2(1640,2035) 1664.23,2035 ; 1664.23,2035.1 1715.1,2035.1 1745,2065 2175.91,2065 2185.02,2055.89 2213.46,2055.89 2417.57,2260 2455.88,2260 2480.88,2285 v2(2515,2285) ; v2(2680,2620) 2680,2600 2701.1,2578.9 TP44.1@2701.1,2496.1 2701.1,2466.1 2690,2455 v2(2690,2420)
FET_PWM3: TP45.1 U3.65 U8.4 | length 1828.1
  Top Layer w8: U3.65@1469.65,1924.41 1506.98,1924.41 1582.57,2000 v2(1615,2000) ; v2(2490,2260) 2491.5,2258.5 2547.71,2258.5 2561.21,2245 2632.43,2245 2715,2327.57 v2@2715,2435 ; U8.4@2700,2706.02 U8.4@2700.2,2706.22 2700.2,2649.8 v2(2710,2640)
  Bottom Layer w8: v2(1615,2000) 1701.21,2000 1751.21,2050 2169.69,2050 2178.8,2040.89 2219.68,2040.89 2423.79,2245 2475,2245 v2(2490,2260) ; v2(2710,2640) 2710,2611.21 2740,2581.21 TP45.1@2740,2555 2740,2470 v2(2715,2445)
FET_PWM4: TP46.1 U3.67 U8.5 | length 1882
  Top Layer w8: U3.67@1469.65,1885.04 1503.4,1885.04 1516.08,1897.72 1516.08,1912.29 1578.79,1975 v2(1640,1975) ; v2(2515,2235) 2550,2235 2555,2230 2640,2230 2740,2330 v2@2740,2410 ; U8.5@2725.8,2706.22 2725,2705.42 2725,2658.23 2736.5,2646.73 v2(2736.5,2618.25)
  Bottom Layer w8: v2(1640,1975) 1643.5,1978.5 1700.93,1978.5 1757.43,2035 2163.48,2035 2172.59,2025.89 2225.89,2025.89 2430,2230 2488.5,2230 2495,2236.5 2513.5,2236.5 v2(2515,2235) ; v2(2736.5,2618.25) 2780,2574.75 TP46.1@2780,2495 2780,2488.79 2740,2448.79 v2(2740,2420)
FET_PWM5: TP47.1 U3.133 U8.6 | length 966.1
  Top Layer w8: U3.133@2300.35,2259.06 2436.69,2259.06 2484.24,2211.5 2646.5,2211.5 2770,2335 v2@2770,2435 ; U8.6@2751.39,2706.22 2750,2704.83 2750,2655.95 2760,2645.95 v2(2760,2640)
  Bottom Layer w8: v2(2760,2640) 2760,2615.96 2785.96,2590 2795,2590 2820,2565 TP47.1@2820,2555 2820,2480 2799,2459 2784,2459 v2(2770,2445)
FGND: D8.C H1.1 H2.1 H3.1 H4.1 S1.3 S1.4 | length 14849
  Top Layer w40: v1(455,2120) D8.C@455,2151.69
  Bottom Layer w40: 122.6,271.1 52,341.7 52,1947 205,2100 435,2100 v1(455,2120) ; 122.6,3778.9 62,3718.3 62,3353 142,3273 S1.3@194,3273 S1.4@194,2997 200.25,2990.75 200.25,2572.95 160,2532.7 160,2216.4 210,2166.4 210,2105 ; H3.1@266.85,3923.15 336.7,3993 3763.3,3993 3828.9,3927.4 ; 271.1,122.6 335.7,58 3756.04,58 3824.89,126.85 ; 3977.4,271.1 4043,336.7 4043,3713.3 3977.4,3778.9
  Bottom Layer w50: 122.6,271.1 H2.1@126.85,266.85 ; 122.6,3778.9 H3.1@126.85,3783.15 ; 3828.9,3927.4 H4.1@3833.15,3923.15 ; H1.1@3973.15,266.85 3977.4,271.1
GND: "Heat Power.2" "Heat Power.4" "Motor Power.2" C1_ES1.2 C1_ES2.2 C1_ES3.2 C2_ES1.2 C2_ES2.2 C2_ES3.2 C3_M1.2 C3_M2.2 C3_M3.2 C3_M4.2 C4.1 C5_M1.2 C5_M2.2 C5_M3.2 C5_M4.2 C6_M1.2 C6_M2.2 C6_M3.2 C6_M4.2 C7.2 C8_M1.2 C8_M2.2 C8_M3.2 C8_M4.2 C9.2 C10.2 C11.2 C12_M1.1 C12_M2.1 C12_M3.1 C12_M4.1 C13.1 C14_M1.1 C14_M2.1 C14_M3.1 C14_M4.1 C15.2 C16.2 C17.1 C18.2 C19.1 C20.1 C21.2 C22.2 C23.1 C25.1 C26.1 C27.1 C28.1 C29.1 C30_TR1.1 C30_TR2.1 C31_TC1.1 C31_TC2.1 C32.1 C33.1 C34.1 C36.1 C37.1 C38.1 C39.1 C41.1 C42.1 C43.1 C44.1 C45.1 C46.1 C47.1 C48.1 C50.1 C51.1 C52.2 C53.1 C54.1 C55.1 C56.1 C57.1 C60.1 C61.1 C62.2 C63.1 C64.1 C65.1 C67.2 C69.1 C70.1 C71_M1.1 C71_M2.1 C71_M3.1 C71_M4.1 C72.2 C73.1 C75_M1.1 C75_M2.1 C75_M3.1 C75_M4.1 D1.1 D4.1 D5_TR1.1 D5_TR2.1 D6.1 D7.C D9.C D20_M1.C D20_M2.C D20_M3.C D20_M4.C D21_M1.C D21_M2.C D21_M3.C D21_M4.C D22_M1.C D22_M2.C D22_M3.C D22_M4.C D23_M1.C D23_M2.C D23_M3.C D23_M4.C D24.C D25.C D26.C D27.C D28.C D29.C DA1.3 DA2.3 DA3.3 JTAG/DEBUG.3 JTAG/DEBUG.5 JTAG/DEBUG.9 MAX1_ES1.2 MAX1_ES2.2 MAX1_ES3.2 MIN1_ES1.2 MIN1_ES2.2 MIN1_ES3.2 P2_TR1.2 P2_TR2.2 P3.9 P5.15 P6.15 Q2.2 Q3.2 Q4.1 Q4.2 Q4.3 Q5.1 Q5.2 Q5.3 Q6.1 Q6.2 Q6.3 Q7.1 Q7.2 Q7.3 R4.2 R9.1 R12.2 R23.1 R32_M1.1 R32_M2.1 R32_M3.1 R32_M4.1 R33_M1.1 R33_M2.1 R33_M3.1 R33_M4.1 R38.1 R39.1 R46.2 R55.2 R59.2 R63.2 R67.2 R71.2 S1.2 U1.5 U1.7 U1.11 U2.2 U2.4 U3.12 U3.33 U3.44 U3.46 U3.54 U3.58 U3.74 U3.106 U3.126 U4_TC1.1 U4_TC2.1 U5.14 U5.28 U5.29 U6.9 U6.15 U7_M1.14 U7_M1.28 U7_M1.29 U7_M2.14 U7_M2.28 U7_M2.29 U7_M3.14 U7_M3.28 U7_M3.29 U7_M4.14 U7_M4.28 U7_M4.29 U8.9 U9.4 | length 8854.6
  Top Layer w10: v1(50,2775) D29.C@103,2775 ; v1(50,2825) 98,2825 D24.C@103,2830 ; v1(221.26,408.74) 243.49,408.74 C3_M1.2@261.23,391 ; C5_M1.2@361.23,391 361.23,368.77 v1(371.26,358.74) ; v1@538.77,361.23 C8_M1.2@538.77,390 ; C6_M1.2@638.77,390 670,390 v1@686.26,373.74 ; C75_M1.1@693.74,727.44 v4(693.74,758.74) ; R55.2@798.4,3463.13 R55.2@806,3455.53 ; v1(916.26,408.74) 938.49,408.74 C3_M2.2@956.23,391 ; v1(1056.23,353.77) C5_M2.2@1056.23,391 ; 1179.12,2113.7 1185.42,2120 ; v2@1200,2070 1185.42,2084.58 1185.42,2120 ; v1(1233.77,353.74) C8_M2.2@1233.77,390 ; C37.1@1265,2130 1195.42,2130 1185.42,2120 ; R4.2@1319.97,2279.53 1389.88,2279.53 1408.78,2298.43 U3.46@1469.65,2298.43 1513.43,2298.43 1526.69,2311.69 1526.69,2331.75 1526.69,2337.8 U3.44@1469.65,2337.8 ; C6_M2.2@1333.77,390 1365,390 v1@1381.26,373.74 ; C75_M2.1@1388.74,727.44 v4(1388.74,758.74) ; C64.1@1446.3,1555 1435,1555 v2(1415,1575) 1415,1625 1430,1640 1455,1640 1490,1675 1525,1675 1531.69,1668.31 1547.93,1668.31 1560.2,1680.58 U3.74@1560.2,1715.75 1560.2,1757.01 1546.1,1771.1 ; U3.58@1469.65,2062.2 1537.2,2062.2 ; U3.54@1469.65,2140.94 1514.06,2140.94 1535,2120 1535,2065 1537.5,2062.5 ; C33.1@1583.7,2710 1583.7,2623.86 1599.57,2607.99 U3.33@1599.57,2546.46 1599.57,2476.26 v1(1629.72,2446.1) ; C33.1@1585,2713.91 1602.56,2731.47 C32.1@1602.56,2746.1 ; v1(1611.29,408.71) 1633.52,408.71 C52.2@1651.26,390.97 ; v1(1751.26,353.74) C62.2@1751.26,390.97 ; v1(1928.8,353.71) C72.2@1928.8,389.97 ; v1(1975,2675) 1975,2657.46 1990,2642.46 1984,2636.46 1984,2613.57 2012.95,2584.61 U3.12@2012.95,2546.46 ; C67.2@2028.8,389.97 2060.03,389.97 v1@2076.29,373.71 ; C51.1@2083.77,727.41 v4(2083.77,758.71) ; C23.1@2141.1,1582.4 C45.1@2181.1,1582.4 2188.7,1590 v2(2220,1590) ; v1(2161.1,1781.1) 2190.12,1752.09 U3.106@2190.12,1715.75 ; U3.126@2300.35,2121.26 2347.56,2121.26 C46.1@2370,2143.7 ; v1(2306.26,408.74) 2328.49,408.74 C3_M3.2@2346.23,391 ; v1(2446.23,353.77) C5_M3.2@2446.23,391 ; v1(2623.77,353.74) C8_M3.2@2623.77,390 ; C6_M3.2@2723.77,390 2755,390 v1@2771.26,373.74 ; C75_M3.1@2778.74,727.44 v4(2778.74,758.74) ; C2_ES1.2@2922.56,1525 v1(2960,1525) ; v1(2975,2965) 2975,3003.33 R12.2@2978.32,3006.65 ; v1(3001.26,408.74) 3023.49,408.74 C3_M4.2@3041.23,391 ; v1@3024.83,3162.91 U1.5@3024.83,3185.06 ; DA1.3@3050,1442.6 v1(3050,1530) ; C31_TC2.1@3103.7,2360 v1(3140,2360) ; v1(3135,1525) C1_ES1.2@3172.91,1525 ; v1(3141.23,353.77) C5_M4.2@3141.23,391 ; v1(3318.77,353.74) C8_M4.2@3318.77,390 ; C2_ES3.2@3329,1525 v1(3375,1525) ; C6_M4.2@3418.77,390 3450,390 v1@3466.26,373.74 ; DA3.3@3465,1447.6 v1(3465,1535) ; C75_M4.1@3473.74,727.44 v4(3473.74,758.74) ; v1(3555,1525) C1_ES3.2@3592.91,1525 ; v1(3570,2155) 3570,2187.44 3570.98,2188.43 D5_TR2.1@3630,2188.43 ; C2_ES2.2@3752.56,1525 v1(3790,1525) ; DA2.3@3880,1447.6 v1(3880,1535) ; C30_TR1.1@3905,2187.44 3905.98,2188.43 D5_TR1.1@3965,2188.43 ; v1(3970,1525) C1_ES2.2@4007.91,1525
  Top Layer w12: 3112.95,3083 3131.36,3101.41 3182.42,3101.41 3246.88,3165.87 3246.88,3196.35 3238.49,3204.74 U1.7@3213.8,3204.74
  Top Layer w15: C12_M1.1@565,1166.7 C14_M1.1@604,1166.7 C71_M1.1@643,1166.7 694.22,1166.7 v1(696.26,1168.74) ; v1(985,2475) U6.9@1085.12,2475 ; v1(1000,2775) 1001.3,2773.7 C56.1@1200,2773.7 ; C55.1@1110,2131.77 1131.77,2110 C54.1@1151.3,2110 ; C54.1@1160,2113.7 1179.12,2113.7 ; v1(1170,2415) 1208.94,2415 R23.1@1210.47,2416.54 ; v1(1170,2465) C73.1@1212.44,2465 ; C61.1@1220,2333.7 v1(1220,2370) 1256.77,2370 C60.1@1265,2361.77 ; C28.1@1246.22,2252.56 1263.66,2270 v1(1281.22,2270) ; C12_M2.1@1260,1166.7 C14_M2.1@1299,1166.7 C71_M2.1@1338,1166.7 1369.22,1166.7 1371.26,1168.74 v1(1391.26,1168.74) ; v2(1265,1900) 1265.82,1900 1283.56,1917.74 ; C37.1@1265,2133.7 1284.96,2153.66 1358.66,2153.66 1380,2175 v2(1395,2175) ; C53.1@1291.22,2233.7 1281.22,2243.7 v1(1281.22,2270) ; 1310.75,2279.53 1301.22,2270 v1(1281.22,2270) ; C48.1@1335,1911.3 1319.48,1911.3 1316.18,1908 1293.3,1908 1290,1911.3 1283.56,1917.74 ; C43.1@1337.56,2755 C44.1@1382.44,2755 v1(1382.44,2812.44) ; v1(1340,1760) 1340,1756.69 1375,1721.69 C27.1@1375,1703.7 1400.04,1703.7 1422.44,1726.1 1481.1,1726.1 1526.1,1771.1 1546.1,1771.1 ; 1526.69,2337.8 v1(1545,2356.1) ; 1537.5,2062.5 v1(1560,2085) ; C33.1@1588.91,2710 v2(1615,2710) ; v1(1665,2825) JTAG/DEBUG.9@1665,2904.92 ; v1(1765,2825) JTAG/DEBUG.5@1765,2904.92 ; v1(1815,2825) 1815,2894.92 1820,2899.92 JTAG/DEBUG.3@1815,2904.92 ; C69.1@1956.26,1168.44 C70.1@1996.26,1168.44 C50.1@2036.26,1168.44 2085.48,1168.44 v1(2086.52,1169.48) ; U9.4@2003.7,1285 v2(2080,1285) ; C38.1@2055,2703.7 v1(2086.3,2703.7) ; C29.1@2331.77,1435 2318.7,1448.07 C34.1@2318.7,1475 2345,1501.3 v2(2345,1500) ; C46.1@2370,2143.7 v2(2400,2143.7) 2415,2143.7 C39.1@2434.35,2124.35 ; P3.9@2430,2820 2485,2875 2485,2930 2506,2951 C17.1@2560,2951 ; C26.1@2520,2686.3 2568.7,2686.3 v1(2600,2655) ; C12_M3.1@2650,1166.7 C14_M3.1@2689,1166.7 C71_M3.1@2728,1166.7 2779.22,1166.7 v1(2781.26,1168.74) ; U8.9@2802.57,2928.66 v1(2802.57,3012.43) ; v1(2898.76,3365.43) C10.2@2950.31,3365.43 ; v2(2985,2150) U4_TC2.1@3069.49,2150 ; v1@3024.83,3162.91 3045.31,3142.43 C22.2@3045.31,3125.43 ; D7.C@3046.76,3440.43 3046.76,3403.03 3064.32,3385.48 3064.32,3358.87 v1(3080.76,3342.43) C9.2@3134.46,3342.43 ; C9.2@3140.46,3348.43 v1(3187.31,3348.43) C21.2@3243.31,3348.43 ; v1(3300,2150) U4_TC1.1@3384.49,2150 ; C12_M4.1@3343.74,1167.44 v1@3467.44,1167.44 ; C31_TC1.1@3427.56,2355 v1(3450,2355) ; v1(3485,2085) D1.1@3485,2140.63 ; C19.1@3835,2303.7 3865,2333.7 v1(3865,2335) ; v1(3905,2150) C30_TR1.1@3905,2187.44 ; 1283.56,1917.74 1270,1931.3 1283.56,1917.74
  Top Layer w25: C11.2@3332.09,3420.43 3347.31,3420.43 v1(3370.31,3397.43)
  Top Layer w35: D20_M1.C@166.26,480 181.26,465 v1(181.26,413.74) ; v1(180,595) D21_M1.C@246.26,595 ; D23_M1.C@653.74,595 v1(720,595) ; v1(738.74,413.74) D22_M1.C@738.74,480 ; v1(861.26,413.74) D20_M2.C@861.26,480 ; v1(875,595) D21_M2.C@941.26,595 ; D23_M2.C@1348.74,595 v1(1415,595) ; v1(1433.74,413.74) D22_M2.C@1433.74,480 ; v1(1556.29,413.71) D25.C@1556.29,479.97 ; v1(1570.03,594.97) D26.C@1636.29,594.97 ; D28.C@2043.77,594.97 v1(2110.03,594.97) ; v1(2128.77,413.71) D27.C@2128.77,479.97 ; v1(2251.26,413.74) D20_M3.C@2251.26,480 ; v1(2265,595) D21_M3.C@2331.26,595 ; D23_M3.C@2738.74,595 v1(2805,595) ; v1(2823.74,413.74) D22_M3.C@2823.74,480 ; v1(2946.26,413.74) D20_M4.C@2946.26,480 ; v1(2960,595) D21_M4.C@3026.26,595 ; D23_M4.C@3433.74,595 v1(3500,595) ; v1(3518.74,413.74) D22_M4.C@3518.74,480
  other v1: 538.77,353.74 3865,370 3930,370 3995,370 686.26,383.74 1381.26,383.74 2076.29,383.71 2771.26,383.74 3466.26,383.74 3865,435 3930,435 3995,435 3995,500 3995,565 3865,630 3930,630 3995,630 3865,695 3930,695 3995,695 3865,760 3930,760 3995,760 3865,825 3930,825 3995,825 3865,890 3930,890 3995,890 256.26,1103.74 951.26,1103.74 1646.52,1104.48 2341.26,1103.74 3036.26,1103.74 191.26,1168.74 256.26,1168.74 886.26,1168.74 951.26,1168.74 1581.52,1169.48 1646.52,1169.48 2276.26,1168.74 2341.26,1168.74 2971.26,1168.74 3036.26,1168.74 3476.26,1168.74 191.26,1233.74 256.26,1233.74 696.26,1233.74 761.26,1233.74 886.26,1233.74 951.26,1233.74 1391.26,1233.74 1456.26,1233.74 1581.52,1234.48 1646.52,1234.48 2086.52,1234.48 2151.52,1234.48 2276.26,1233.74 2341.26,1233.74 2781.26,1233.74 2971.26,1233.74 3036.26,1233.74 3476.26,1233.74 191.26,1298.74 256.26,1298.74 2341.26,1298.74 3541.26,1298.74 3870,2895 3790,2905 3945,2905 3755,2970 3985,2970 3790,3035 3945,3035 3870,3045 815,3080 885,3080 955,3080 1025,3080 1215,3080 1285,3080 1355,3080 1425,3080 1615,3080 1685,3080 1755,3080 1825,3080 2020,3080 2090,3080 2160,3080 2230,3080 1684.5,3129.19 1754.5,3129.19 1824.5,3129.19 2019.5,3129.19 2089.5,3129.19 2159.5,3129.19 2229.5,3129.19 815,3130 885,3130 955,3130 1025,3130 1213.5,3129.61 1283.5,3129.61 1353.5,3129.61 1423.5,3129.61 1615,3130 385,3151 3031.31,3156.43 2410,3165 2480,3165 2550,3165 2620,3165 2690,3165 2410,3235 2480,3235 2550,3235 2645,3375 2705,3375 2645,3435 2705,3435 2645,3495 2705,3495 2645,3555 2705,3555 355,3600 410,3600 465,3600 520,3600 575,3600 2645,3615 2705,3615 2645,3675 745,3710 785,3710 745,3755 785,3755
  other v2: 1200,2060
  other v3: 363.39,895.69 406.69,895.69 450,895.69 493.31,895.69 536.61,895.69 1058.39,895.69 1101.69,895.69 1145,895.69 1188.31,895.69 1231.61,895.69 1753.65,895.69 1796.95,895.69 1840.26,895.69 1883.57,895.69 1926.87,895.69 2448.39,895.69 2491.69,895.69 2535,895.69 2578.31,895.69 2621.61,895.69 3143.39,895.69 3186.69,895.69 3230,895.69 3273.31,895.69 3316.61,895.69 363.39,939 406.69,939 450,939 493.31,939 536.61,939 1058.39,939 1101.69,939 1145,939 1188.31,939 1231.61,939 1753.65,939 1796.95,939 1840.26,939 1883.57,939 1926.87,939 2448.39,939 2491.69,939 2535,939 2578.31,939 2621.61,939 3143.39,939 3186.69,939 3230,939 3273.31,939 3316.61,939 363.39,982.31 406.69,982.31 450,982.31 493.31,982.31 536.61,982.31 1058.39,982.31 1101.69,982.31 1145,982.31 1188.31,982.31 1231.61,982.31 1753.65,982.31 1796.95,982.31 1840.26,982.31 1883.57,982.31 1926.87,982.31 2448.39,982.31 2491.69,982.31 2535,982.31 2578.31,982.31 2621.61,982.31 3143.39,982.31 3186.69,982.31 3230,982.31 3273.31,982.31 3316.61,982.31
  other v5: 3079.94,3185.06 3119.31,3185.06 3158.68,3185.06 3079.94,3224.43 3119.31,3224.43 3158.68,3224.43 3079.94,3263.8 3119.31,3263.8 3158.68,3263.8
  other v6: 3191,3006 3191,3071
GPIO_P_0: 
GPIO_P_1: 
GPIO_P_2: 
GPIO_P_3: 
GPIO_P_4: 
GPIO_P_5: 
HOLD#: U3.103 U9.7 | length 703.6
  Top Layer w8: U3.103@2131.06,1715.75 2131.06,1656.06 2115,1640 2115,1485 2125,1475 2125,1305 v2(2155,1275) ; U9.7@2216.3,1385 2240,1385 v2(2275,1350)
  Bottom Layer w8: v2(2155,1275) 2226.31,1275 2275,1323.69 v2(2275,1350)
I2C_SCL: P3.3 P5.1 U3.70 | length 4392
  Top Layer w8: P5.1@200,1440 250,1490 250,1565 390,1705 1070.55,1705 1145.55,1780 1240.8,1780 1286.79,1825.98 U3.70@1469.65,1825.98 1510.98,1825.98 1531.08,1846.08 1531.08,1906.08 1575,1950 v2(1695,1950) ; v2(2335,1695) 2368.71,1695 2408.71,1655 2485,1655 v2(2500,1670)
  Bottom Layer w8: v2(1695,1950) 1765,2020 2157.27,2020 2166.38,2010.89 2269.11,2010.89 2335,1945 v2(2335,1695) ; P3.3@2130,2820 2130,2818.79 2218.79,2730 2218.79,2673.79 2330,2562.57 2330,2450 2390,2390 2538.23,2390 2585,2343.23 2585,2197.28 2583.5,2195.78 2583.5,2191.63 2490,2098.13 2490,1713.38 2500,1703.38 v2(2500,1670)
I2C_SDA: P3.4 P5.2 U3.9 | length 2967
  Top Layer w8: P5.2@200,1540 380,1720 1064.34,1720 1139.34,1795 1205,1795 1220,1810 v2(1235,1810) ; v2(2125,2365) 2096,2394 2096,2477.57 2072.01,2501.56 U3.9@2072.01,2546.46 2072.01,2607.01 2120,2655 2120,2760 2080,2800 2080,2870 P3.4@2130,2920
  Bottom Layer w8: v2(1235,1810) 1328.5,1903.5 1328.5,1973.5 1345,1990 1428.79,1990 1490,2051.21 1490,2094.2 1539.3,2143.5 1695.93,2143.5 1764.53,2212.1 1937.1,2212.1 2090,2365 v2(2125,2365)
INPUT_GND: C24.1 C58.1 C59.1 DA4.3 R24.1 U6.2 U6.8 USB.4 | length 383.9
  Top Layer w22: v1(316.1,2156.1) R24.1@405,2156.1 ; v1(445.88,2550) DA4.3@518.28,2550 ; v1(615,2750) 646.3,2750 C59.1@650,2753.7 650,2775 U6.2@724.88,2775 ; U6.8@724.88,2475 v1(814.76,2475)